# Allegro board PRACTICA2-2.brd
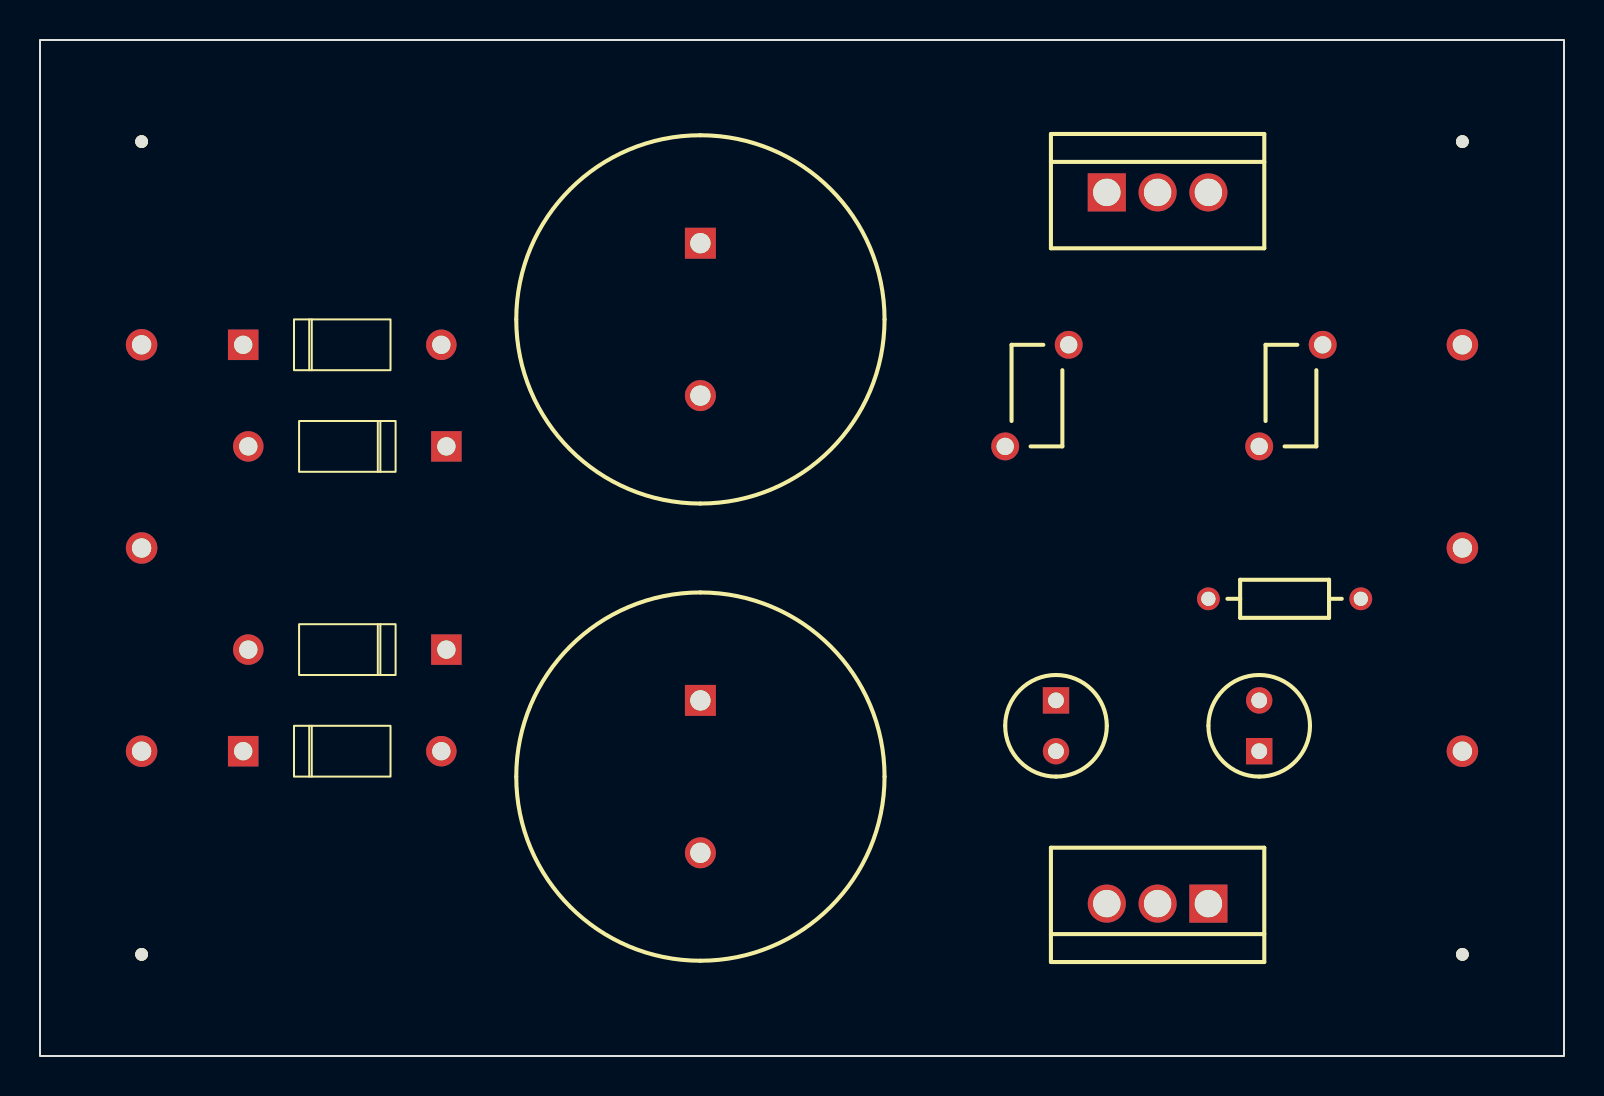
[diagram p0: board, top side]
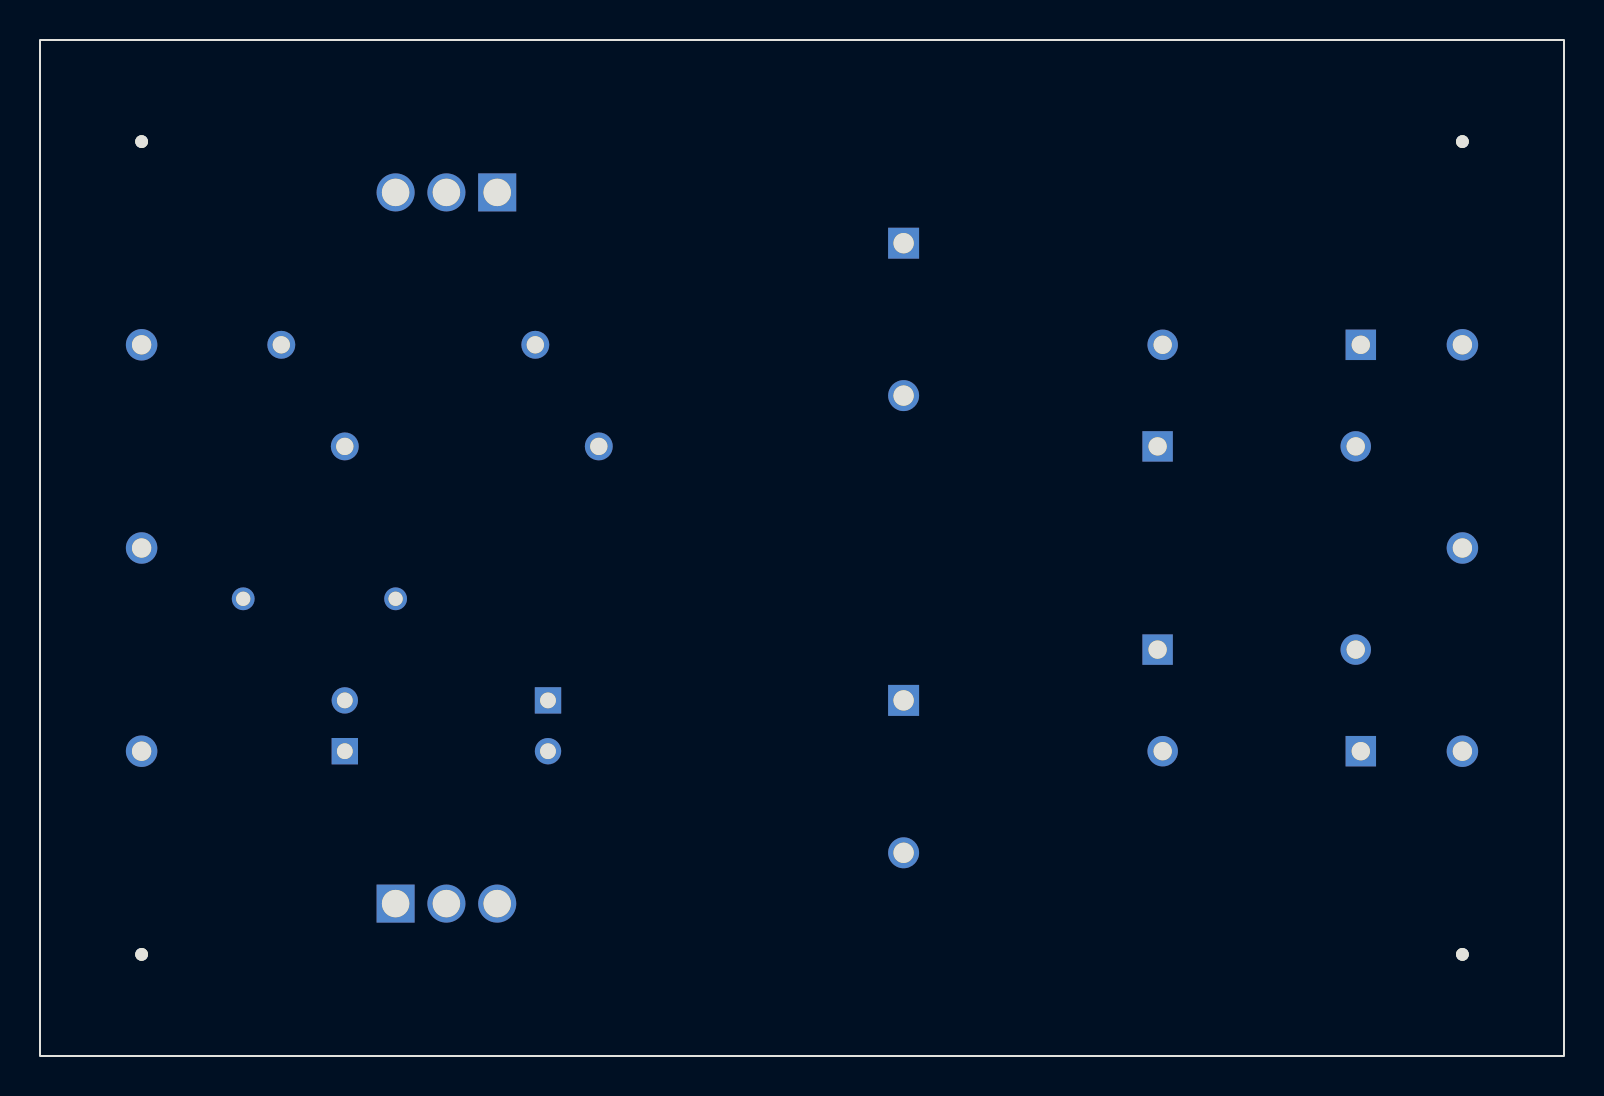
[diagram p1: board, bottom side, seen from below]

Outline 76.2 x 50.8 mm; copper layers: TOP, BOTTOM. Coordinates in mm from the lower left corner of the outline.
Outline path: rectangle 0,0 76.2,50.8

## Design rules (mm)
constraint set DEFAULT: min track width 0.127

## Placement (name value [footprint] x y rotation side)
C1  2200u  [CYLD725LS300040]  33.02 40.64 270 top
C2  2200u  [CYLD725LS300040]  33.02 17.78 270 top
C3  0.22u  [DISC200X100LS200X125034]  48.26 30.48 90 top
C4  2.2uF  [CYLD200LS100031]  50.8 17.78 270 top
C5  0.1u  [DISC200X100LS200X125034]  60.96 30.48 90 top
C6  1uF  [CYLD200LS100031]  60.96 15.24 90 top
D1  D1N4002  [DO41]  10.16 35.56 270 top
D2  D1N4002  [DO41]  20.32 30.48 90 top
D3  D1N4002  [DO41]  20.32 20.32 90 top
D4  D1N4002  [DO41]  10.16 15.24 270 top
J1  CON1  [TESTCOUP]  5.08 35.56 0 top
J2  CON1  [TESTCOUP]  5.08 25.4 0 top
J3  CON1  [TESTCOUP]  5.08 15.24 0 top
J4  CON1  [TESTCOUP]  71.12 35.56 0 top
J5  CON1  [TESTCOUP]  71.12 25.4 0 top
J6  CON1  [TESTCOUP]  71.12 15.24 0 top
NOREF  -  [unnamed]  5.08 5.08 0 top
NOREF#2  -  [unnamed]  5.08 45.72 0 top
NOREF#3  -  [unnamed]  71.12 5.08 0 top
NOREF#4  -  [unnamed]  71.12 45.72 0 top
R1  2.4k  [AXRC05]  58.42 22.86 0 top
U1  LM7812C  [TO220AB]  53.34 43.18 0 top
U2  LM7912C  [TO220AB]  58.42 7.62 180 top

## Library data of the parts
C1 C2 C4 C6 = C_elect_2
C3 C5 = C
D1-D4 = D1N4002
J1-J6 = CON1
R1 = R
U1 = LM7812C
U2 = LM7912C

## Footprints (pads in the part's own frame, mm; a bottom-side part is the same pattern mirrored in y, then rotated)
AXRC05
  round 1.143 hole 0.711: 1(0,0) 2(7.62,0)
CYLD200LS100031
  rect 1.321x1.321 hole 0.787: 1(0,0)
  round 1.321 hole 0.787: 2(2.54,0)
CYLD725LS300040
  rect 1.549x1.549 hole 1.016: 1(0,0)
  round 1.549 hole 1.016: 2(7.62,0)
DISC200X100LS200X125034
  round 1.397 hole 0.864: 1(0,0) 2(5.08,-3.175)
DO41
  rect 1.524x1.524 hole 0.914: 1(0,0)
  round 1.524 hole 0.914: 2(0,9.906)
TESTCOUP
  round 1.575 hole 0.965: 1(0,0)
TO220AB
  rect 1.905x1.905 hole 1.372: 1(0,0)
  round 1.905 hole 1.372: 2(2.54,0) 3(5.08,0)
unnamed
  round 0.635 hole 3.175 unplated: (0,0)

## Nets
0: C1.2(-) C2.1 C3.1 C4.1 C5.1 C6.1 J2.1 J5.1 R1.1 U1.3 U2.1
N1: D1.2 D2.1 J4.1
N2: D3.2 D4.1 J6.1
N3: C1.1 C3.2 D2.2 D4.2 U1.1
N4: C2.2(-) C4.2(-) D1.1 D3.1 U2.3
N5: C5.2 J1.1 U1.2(OUT)
N6: C6.2(-) J3.1 R1.2 U2.2(OUT)
